# EAGLE board touchpad (EAGLE 9.7.0)
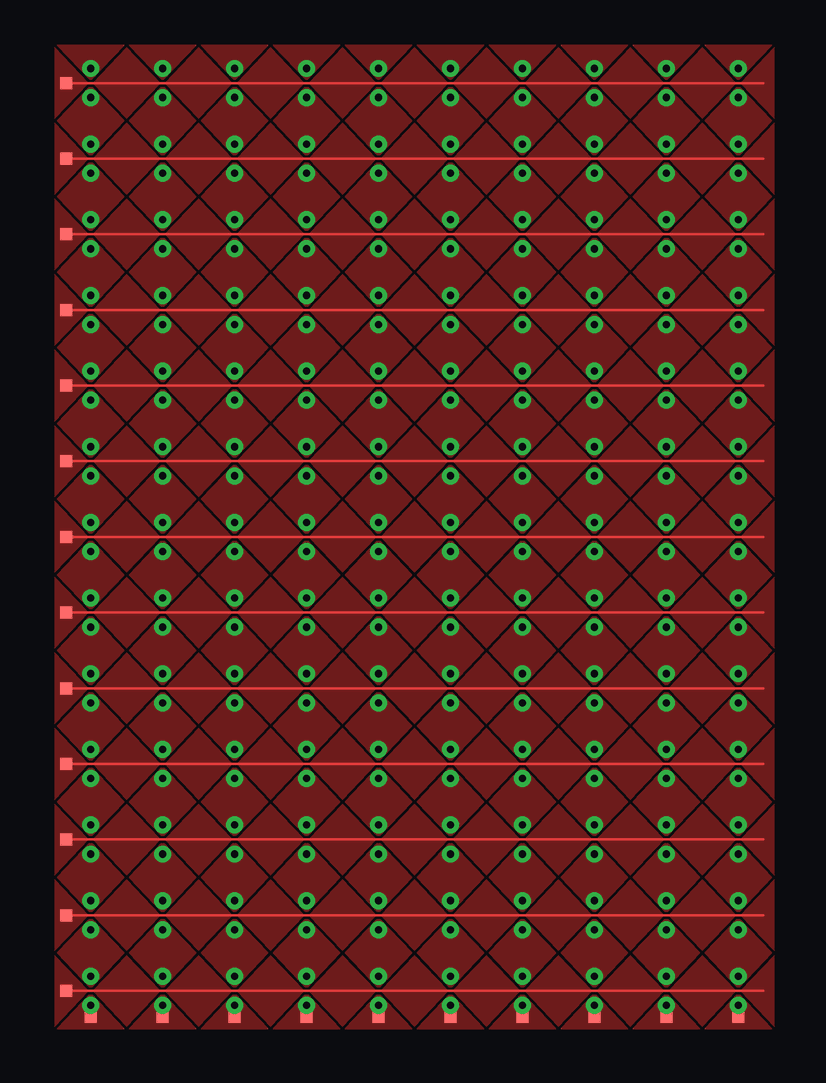
[diagram p0: board, top side]
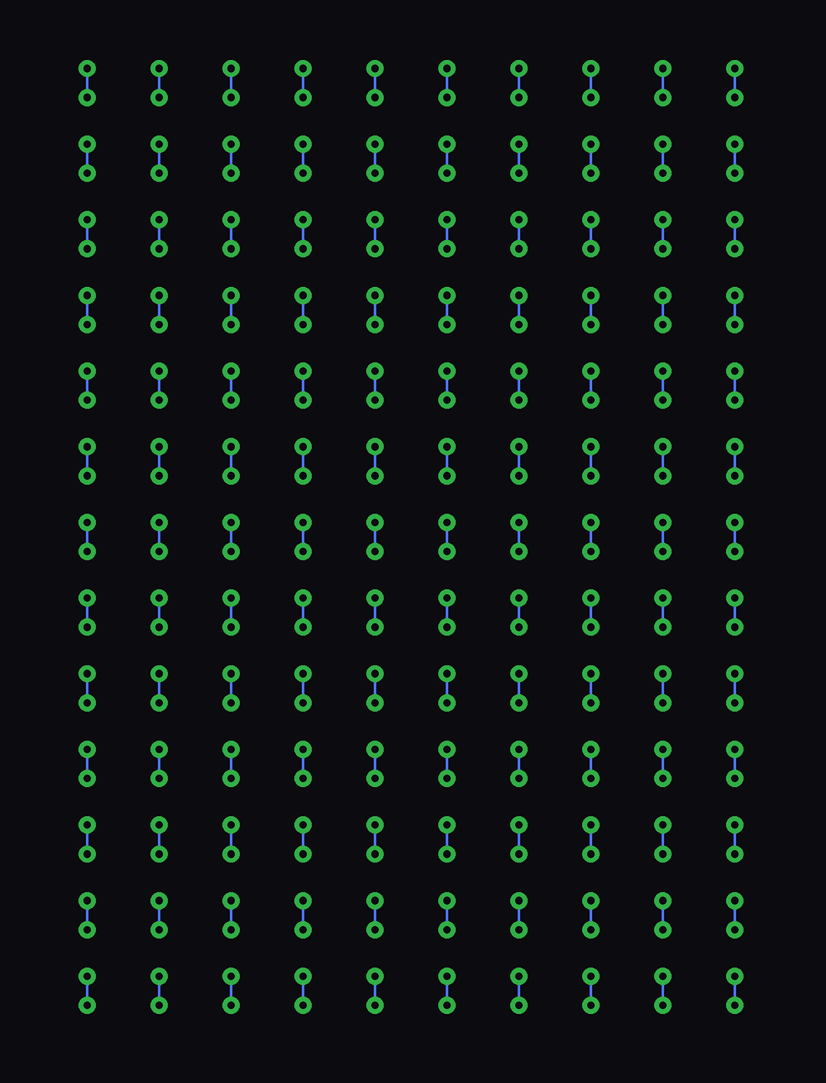
[diagram p1: board, bottom side, seen from below]

No outline drawn. Coordinates in mm, seen from the top.
Copper layers (1*16): Top 0.035mm / dielectric 1.5mm / Bottom 0.035mm
Design rules "JLC-2-Layer.edru": minimum track width 0.1mm, minimum drill 0.35mm, track to track 0.1mm, track to pad 0.1mm, pad to pad 0.1mm, via to via 6mil, smd to smd 0.1mm, copper to edge 0.2mm, drill to drill 6mil, minimum pad ring 10mil, minimum via ring 8mil, stop-mask expansion 4mil, vias tented up to drill 0mil, thermal gap 10mil

## Footprints (pad centres in the part's own frame; a part is rotated, then mirrored left to right if it is on the bottom)
PAD_0_5MM = smd 0.5 x 0.5: P1 0,0

## Placement (x,y rotation side)
COL1  [PAD_0_5MM]  1.5,0.49 0 top
COL2  [PAD_0_5MM]  4.5,0.49 0 top
COL3  [PAD_0_5MM]  7.5,0.49 0 top
COL4  [PAD_0_5MM]  10.5,0.49 0 top
COL5  [PAD_0_5MM]  13.5,0.49 0 top
COL6  [PAD_0_5MM]  16.5,0.49 0 top
COL7  [PAD_0_5MM]  19.5,0.49 0 top
COL8  [PAD_0_5MM]  22.5,0.49 0 top
COL9  [PAD_0_5MM]  25.5,0.49 0 top
COL10  [PAD_0_5MM]  28.5,0.49 0 top
ROW1  [PAD_0_5MM]  0.46,1.58 0 top
ROW2  [PAD_0_5MM]  0.46,4.73 0 top
ROW3  [PAD_0_5MM]  0.46,7.88 0 top
ROW4  [PAD_0_5MM]  0.46,11.04 0 top
ROW5  [PAD_0_5MM]  0.46,14.19 0 top
ROW6  [PAD_0_5MM]  0.46,17.35 0 top
ROW7  [PAD_0_5MM]  0.46,20.5 0 top
ROW8  [PAD_0_5MM]  0.46,23.65 0 top
ROW9  [PAD_0_5MM]  0.46,26.81 0 top
ROW10  [PAD_0_5MM]  0.46,29.96 0 top
ROW11  [PAD_0_5MM]  0.46,33.12 0 top
ROW12  [PAD_0_5MM]  0.46,36.27 0 top
ROW13  [PAD_0_5MM]  0.46,39.42 0 top

## Library data of the parts
COL1-COL10 ROW1-ROW13 = touchpad

## Nets
COL1: COL1.P1
COL2: COL2.P1
COL3: COL3.P1
COL4: COL4.P1
COL5: COL5.P1
COL6: COL6.P1
COL7: COL7.P1
COL8: COL8.P1
COL9: COL9.P1
COL10: COL10.P1
ROW1: ROW1.P1
ROW2: ROW2.P1
ROW3: ROW3.P1
ROW4: ROW4.P1
ROW5: ROW5.P1
ROW6: ROW6.P1
ROW7: ROW7.P1
ROW8: ROW8.P1
ROW9: ROW9.P1
ROW10: ROW10.P1
ROW11: ROW11.P1
ROW12: ROW12.P1
ROW13: ROW13.P1

## Tracks (layer width: path | path; a pad name or v marks a point on that pad's centre or on a via)
COL1  (via drill 0.3 pad 0.4)
  Bottom 0.1: v1.5,0.97 v1.5,2.18 | v1.5,4.12 v1.5,5.34 | v1.5,7.28 v1.5,8.49 | v1.5,10.43 v1.5,11.64 | v1.5,13.59 v1.5,14.8 | v1.5,16.74 v1.5,17.95 | v1.5,19.89 v1.5,21.11 | v1.5,23.05 v1.5,24.26 | v1.5,26.2 v1.5,27.41 | v1.5,29.36 v1.5,30.57 | v1.5,32.51 v1.5,33.72 | v1.5,35.66 v1.5,36.88 | v1.5,38.82 v1.5,40.03
  pour Top (no thermals): 1.5,1.47 0.11,0 2.89,0
  pour Top (no thermals): 1.5,4.62 0.11,3.15 1.5,1.68 2.89,3.15
  pour Top (no thermals): 1.5,7.78 0.11,6.31 1.5,4.84 2.89,6.31
  pour Top (no thermals): 1.5,10.93 0.11,9.46 1.5,7.99 2.89,9.46
  pour Top (no thermals): 1.5,14.09 0.11,12.62 1.5,11.14 2.89,12.62
  pour Top (no thermals): 1.5,17.24 0.11,15.77 1.5,14.3 2.89,15.77
  pour Top (no thermals): 1.5,20.39 0.11,18.92 1.5,17.45 2.89,18.92
  pour Top (no thermals): 1.5,23.55 0.11,22.08 1.5,20.61 2.89,22.08
  pour Top (no thermals): 1.5,26.7 0.11,25.23 1.5,23.76 2.89,25.23
  pour Top (no thermals): 1.5,29.86 0.11,28.38 1.5,26.91 2.89,28.38
  pour Top (no thermals): 1.5,33.01 0.11,31.54 1.5,30.07 2.89,31.54
  pour Top (no thermals): 1.5,36.16 0.11,34.69 1.5,33.22 2.89,34.69
  pour Top (no thermals): 1.5,39.32 0.11,37.85 1.5,36.38 2.89,37.85
  pour Top (no thermals): 2.89,41 0.11,41 1.5,39.53
COL2  (via drill 0.3 pad 0.4)
  Bottom 0.1: v4.5,0.97 v4.5,2.18 | v4.5,4.12 v4.5,5.34 | v4.5,7.28 v4.5,8.49 | v4.5,10.43 v4.5,11.64 | v4.5,13.59 v4.5,14.8 | v4.5,16.74 v4.5,17.95 | v4.5,19.89 v4.5,21.11 | v4.5,23.05 v4.5,24.26 | v4.5,26.2 v4.5,27.41 | v4.5,29.36 v4.5,30.57 | v4.5,32.51 v4.5,33.72 | v4.5,35.66 v4.5,36.88 | v4.5,38.82 v4.5,40.03
  pour Top (no thermals): 4.5,1.47 3.11,0 5.89,0
  pour Top (no thermals): 4.5,4.62 3.11,3.15 4.5,1.68 5.89,3.15
  pour Top (no thermals): 4.5,7.78 3.11,6.31 4.5,4.84 5.89,6.31
  pour Top (no thermals): 4.5,10.93 3.11,9.46 4.5,7.99 5.89,9.46
  pour Top (no thermals): 4.5,14.09 3.11,12.62 4.5,11.14 5.89,12.62
  pour Top (no thermals): 4.5,17.24 3.11,15.77 4.5,14.3 5.89,15.77
  pour Top (no thermals): 4.5,20.39 3.11,18.92 4.5,17.45 5.89,18.92
  pour Top (no thermals): 4.5,23.55 3.11,22.08 4.5,20.61 5.89,22.08
  pour Top (no thermals): 4.5,26.7 3.11,25.23 4.5,23.76 5.89,25.23
  pour Top (no thermals): 4.5,29.86 3.11,28.38 4.5,26.91 5.89,28.38
  pour Top (no thermals): 4.5,33.01 3.11,31.54 4.5,30.07 5.89,31.54
  pour Top (no thermals): 4.5,36.16 3.11,34.69 4.5,33.22 5.89,34.69
  pour Top (no thermals): 4.5,39.32 3.11,37.85 4.5,36.38 5.89,37.85
  pour Top (no thermals): 5.89,41 3.11,41 4.5,39.53
COL3  (via drill 0.3 pad 0.4)
  Bottom 0.1: v7.5,0.97 v7.5,2.18 | v7.5,4.12 v7.5,5.34 | v7.5,7.28 v7.5,8.49 | v7.5,10.43 v7.5,11.64 | v7.5,13.59 v7.5,14.8 | v7.5,16.74 v7.5,17.95 | v7.5,19.89 v7.5,21.11 | v7.5,23.05 v7.5,24.26 | v7.5,26.2 v7.5,27.41 | v7.5,29.36 v7.5,30.57 | v7.5,32.51 v7.5,33.72 | v7.5,35.66 v7.5,36.88 | v7.5,38.82 v7.5,40.03
  pour Top (no thermals): 7.5,1.47 6.11,0 8.89,0
  pour Top (no thermals): 7.5,4.62 6.11,3.15 7.5,1.68 8.89,3.15
  pour Top (no thermals): 7.5,7.78 6.11,6.31 7.5,4.84 8.89,6.31
  pour Top (no thermals): 7.5,10.93 6.11,9.46 7.5,7.99 8.89,9.46
  pour Top (no thermals): 7.5,14.09 6.11,12.62 7.5,11.14 8.89,12.62
  pour Top (no thermals): 7.5,17.24 6.11,15.77 7.5,14.3 8.89,15.77
  pour Top (no thermals): 7.5,20.39 6.11,18.92 7.5,17.45 8.89,18.92
  pour Top (no thermals): 7.5,23.55 6.11,22.08 7.5,20.61 8.89,22.08
  pour Top (no thermals): 7.5,26.7 6.11,25.23 7.5,23.76 8.89,25.23
  pour Top (no thermals): 7.5,29.86 6.11,28.38 7.5,26.91 8.89,28.38
  pour Top (no thermals): 7.5,33.01 6.11,31.54 7.5,30.07 8.89,31.54
  pour Top (no thermals): 7.5,36.16 6.11,34.69 7.5,33.22 8.89,34.69
  pour Top (no thermals): 7.5,39.32 6.11,37.85 7.5,36.38 8.89,37.85
  pour Top (no thermals): 8.89,41 6.11,41 7.5,39.53
COL4  (via drill 0.3 pad 0.4)
  Bottom 0.1: v10.5,0.97 v10.5,2.18 | v10.5,4.12 v10.5,5.34 | v10.5,7.28 v10.5,8.49 | v10.5,10.43 v10.5,11.64 | v10.5,13.59 v10.5,14.8 | v10.5,16.74 v10.5,17.95 | v10.5,19.89 v10.5,21.11 | v10.5,23.05 v10.5,24.26 | v10.5,26.2 v10.5,27.41 | v10.5,29.36 v10.5,30.57 | v10.5,32.51 v10.5,33.72 | v10.5,35.66 v10.5,36.88 | v10.5,38.82 v10.5,40.03
  pour Top (no thermals): 10.5,1.47 9.11,0 11.89,0
  pour Top (no thermals): 10.5,4.62 9.11,3.15 10.5,1.68 11.89,3.15
  pour Top (no thermals): 10.5,7.78 9.11,6.31 10.5,4.84 11.89,6.31
  pour Top (no thermals): 10.5,10.93 9.11,9.46 10.5,7.99 11.89,9.46
  pour Top (no thermals): 10.5,14.09 9.11,12.62 10.5,11.14 11.89,12.62
  pour Top (no thermals): 10.5,17.24 9.11,15.77 10.5,14.3 11.89,15.77
  pour Top (no thermals): 10.5,20.39 9.11,18.92 10.5,17.45 11.89,18.92
  pour Top (no thermals): 10.5,23.55 9.11,22.08 10.5,20.61 11.89,22.08
  pour Top (no thermals): 10.5,26.7 9.11,25.23 10.5,23.76 11.89,25.23
  pour Top (no thermals): 10.5,29.86 9.11,28.38 10.5,26.91 11.89,28.38
  pour Top (no thermals): 10.5,33.01 9.11,31.54 10.5,30.07 11.89,31.54
  pour Top (no thermals): 10.5,36.16 9.11,34.69 10.5,33.22 11.89,34.69
  pour Top (no thermals): 10.5,39.32 9.11,37.85 10.5,36.38 11.89,37.85
  pour Top (no thermals): 11.89,41 9.11,41 10.5,39.53
COL5  (via drill 0.3 pad 0.4)
  Bottom 0.1: v13.5,0.97 v13.5,2.18 | v13.5,4.12 v13.5,5.34 | v13.5,7.28 v13.5,8.49 | v13.5,10.43 v13.5,11.64 | v13.5,13.59 v13.5,14.8 | v13.5,16.74 v13.5,17.95 | v13.5,19.89 v13.5,21.11 | v13.5,23.05 v13.5,24.26 | v13.5,26.2 v13.5,27.41 | v13.5,29.36 v13.5,30.57 | v13.5,32.51 v13.5,33.72 | v13.5,35.66 v13.5,36.88 | v13.5,38.82 v13.5,40.03
  pour Top (no thermals): 13.5,1.47 12.11,0 14.89,0
  pour Top (no thermals): 13.5,4.62 12.11,3.15 13.5,1.68 14.89,3.15
  pour Top (no thermals): 13.5,7.78 12.11,6.31 13.5,4.84 14.89,6.31
  pour Top (no thermals): 13.5,10.93 12.11,9.46 13.5,7.99 14.89,9.46
  pour Top (no thermals): 13.5,14.09 12.11,12.62 13.5,11.14 14.89,12.62
  pour Top (no thermals): 13.5,17.24 12.11,15.77 13.5,14.3 14.89,15.77
  pour Top (no thermals): 13.5,20.39 12.11,18.92 13.5,17.45 14.89,18.92
  pour Top (no thermals): 13.5,23.55 12.11,22.08 13.5,20.61 14.89,22.08
  pour Top (no thermals): 13.5,26.7 12.11,25.23 13.5,23.76 14.89,25.23
  pour Top (no thermals): 13.5,29.86 12.11,28.38 13.5,26.91 14.89,28.38
  pour Top (no thermals): 13.5,33.01 12.11,31.54 13.5,30.07 14.89,31.54
  pour Top (no thermals): 13.5,36.16 12.11,34.69 13.5,33.22 14.89,34.69
  pour Top (no thermals): 13.5,39.32 12.11,37.85 13.5,36.38 14.89,37.85
  pour Top (no thermals): 14.89,41 12.11,41 13.5,39.53
COL6  (via drill 0.3 pad 0.4)
  Bottom 0.1: v16.5,0.97 v16.5,2.18 | v16.5,4.12 v16.5,5.34 | v16.5,7.28 v16.5,8.49 | v16.5,10.43 v16.5,11.64 | v16.5,13.59 v16.5,14.8 | v16.5,16.74 v16.5,17.95 | v16.5,19.89 v16.5,21.11 | v16.5,23.05 v16.5,24.26 | v16.5,26.2 v16.5,27.41 | v16.5,29.36 v16.5,30.57 | v16.5,32.51 v16.5,33.72 | v16.5,35.66 v16.5,36.88 | v16.5,38.82 v16.5,40.03
  pour Top (no thermals): 16.5,1.47 15.11,0 17.89,0
  pour Top (no thermals): 16.5,4.62 15.11,3.15 16.5,1.68 17.89,3.15
  pour Top (no thermals): 16.5,7.78 15.11,6.31 16.5,4.84 17.89,6.31
  pour Top (no thermals): 16.5,10.93 15.11,9.46 16.5,7.99 17.89,9.46
  pour Top (no thermals): 16.5,14.09 15.11,12.62 16.5,11.14 17.89,12.62
  pour Top (no thermals): 16.5,17.24 15.11,15.77 16.5,14.3 17.89,15.77
  pour Top (no thermals): 16.5,20.39 15.11,18.92 16.5,17.45 17.89,18.92
  pour Top (no thermals): 16.5,23.55 15.11,22.08 16.5,20.61 17.89,22.08
  pour Top (no thermals): 16.5,26.7 15.11,25.23 16.5,23.76 17.89,25.23
  pour Top (no thermals): 16.5,29.86 15.11,28.38 16.5,26.91 17.89,28.38
  pour Top (no thermals): 16.5,33.01 15.11,31.54 16.5,30.07 17.89,31.54
  pour Top (no thermals): 16.5,36.16 15.11,34.69 16.5,33.22 17.89,34.69
  pour Top (no thermals): 16.5,39.32 15.11,37.85 16.5,36.38 17.89,37.85
  pour Top (no thermals): 17.89,41 15.11,41 16.5,39.53
COL7  (via drill 0.3 pad 0.4)
  Bottom 0.1: v19.5,0.97 v19.5,2.18 | v19.5,4.12 v19.5,5.34 | v19.5,7.28 v19.5,8.49 | v19.5,10.43 v19.5,11.64 | v19.5,13.59 v19.5,14.8 | v19.5,16.74 v19.5,17.95 | v19.5,19.89 v19.5,21.11 | v19.5,23.05 v19.5,24.26 | v19.5,26.2 v19.5,27.41 | v19.5,29.36 v19.5,30.57 | v19.5,32.51 v19.5,33.72 | v19.5,35.66 v19.5,36.88 | v19.5,38.82 v19.5,40.03
  pour Top (no thermals): 19.5,1.47 18.11,0 20.89,0
  pour Top (no thermals): 19.5,4.62 18.11,3.15 19.5,1.68 20.89,3.15
  pour Top (no thermals): 19.5,7.78 18.11,6.31 19.5,4.84 20.89,6.31
  pour Top (no thermals): 19.5,10.93 18.11,9.46 19.5,7.99 20.89,9.46
  pour Top (no thermals): 19.5,14.09 18.11,12.62 19.5,11.14 20.89,12.62
  pour Top (no thermals): 19.5,17.24 18.11,15.77 19.5,14.3 20.89,15.77
  pour Top (no thermals): 19.5,20.39 18.11,18.92 19.5,17.45 20.89,18.92
  pour Top (no thermals): 19.5,23.55 18.11,22.08 19.5,20.61 20.89,22.08
  pour Top (no thermals): 19.5,26.7 18.11,25.23 19.5,23.76 20.89,25.23
  pour Top (no thermals): 19.5,29.86 18.11,28.38 19.5,26.91 20.89,28.38
  pour Top (no thermals): 19.5,33.01 18.11,31.54 19.5,30.07 20.89,31.54
  pour Top (no thermals): 19.5,36.16 18.11,34.69 19.5,33.22 20.89,34.69
  pour Top (no thermals): 19.5,39.32 18.11,37.85 19.5,36.38 20.89,37.85
  pour Top (no thermals): 20.89,41 18.11,41 19.5,39.53
COL8  (via drill 0.3 pad 0.4)
  Bottom 0.1: v22.5,0.97 v22.5,2.18 | v22.5,4.12 v22.5,5.34 | v22.5,7.28 v22.5,8.49 | v22.5,10.43 v22.5,11.64 | v22.5,13.59 v22.5,14.8 | v22.5,16.74 v22.5,17.95 | v22.5,19.89 v22.5,21.11 | v22.5,23.05 v22.5,24.26 | v22.5,26.2 v22.5,27.41 | v22.5,29.36 v22.5,30.57 | v22.5,32.51 v22.5,33.72 | v22.5,35.66 v22.5,36.88 | v22.5,38.82 v22.5,40.03
  pour Top (no thermals): 22.5,1.47 21.11,0 23.89,0
  pour Top (no thermals): 22.5,4.62 21.11,3.15 22.5,1.68 23.89,3.15
  pour Top (no thermals): 22.5,7.78 21.11,6.31 22.5,4.84 23.89,6.31
  pour Top (no thermals): 22.5,10.93 21.11,9.46 22.5,7.99 23.89,9.46
  pour Top (no thermals): 22.5,14.09 21.11,12.62 22.5,11.14 23.89,12.62
  pour Top (no thermals): 22.5,17.24 21.11,15.77 22.5,14.3 23.89,15.77
  pour Top (no thermals): 22.5,20.39 21.11,18.92 22.5,17.45 23.89,18.92
  pour Top (no thermals): 22.5,23.55 21.11,22.08 22.5,20.61 23.89,22.08
  pour Top (no thermals): 22.5,26.7 21.11,25.23 22.5,23.76 23.89,25.23
  pour Top (no thermals): 22.5,29.86 21.11,28.38 22.5,26.91 23.89,28.38
  pour Top (no thermals): 22.5,33.01 21.11,31.54 22.5,30.07 23.89,31.54
  pour Top (no thermals): 22.5,36.16 21.11,34.69 22.5,33.22 23.89,34.69
  pour Top (no thermals): 22.5,39.32 21.11,37.85 22.5,36.38 23.89,37.85
  pour Top (no thermals): 23.89,41 21.11,41 22.5,39.53
COL9  (via drill 0.3 pad 0.4)
  Bottom 0.1: v25.5,0.97 v25.5,2.18 | v25.5,4.12 v25.5,5.34 | v25.5,7.28 v25.5,8.49 | v25.5,10.43 v25.5,11.64 | v25.5,13.59 v25.5,14.8 | v25.5,16.74 v25.5,17.95 | v25.5,19.89 v25.5,21.11 | v25.5,23.05 v25.5,24.26 | v25.5,26.2 v25.5,27.41 | v25.5,29.36 v25.5,30.57 | v25.5,32.51 v25.5,33.72 | v25.5,35.66 v25.5,36.88 | v25.5,38.82 v25.5,40.03
  pour Top (no thermals): 25.5,1.47 24.11,0 26.89,0
  pour Top (no thermals): 25.5,4.62 24.11,3.15 25.5,1.68 26.89,3.15
  pour Top (no thermals): 25.5,7.78 24.11,6.31 25.5,4.84 26.89,6.31
  pour Top (no thermals): 25.5,10.93 24.11,9.46 25.5,7.99 26.89,9.46
  pour Top (no thermals): 25.5,14.09 24.11,12.62 25.5,11.14 26.89,12.62
  pour Top (no thermals): 25.5,17.24 24.11,15.77 25.5,14.3 26.89,15.77
  pour Top (no thermals): 25.5,20.39 24.11,18.92 25.5,17.45 26.89,18.92
  pour Top (no thermals): 25.5,23.55 24.11,22.08 25.5,20.61 26.89,22.08
  pour Top (no thermals): 25.5,26.7 24.11,25.23 25.5,23.76 26.89,25.23
  pour Top (no thermals): 25.5,29.86 24.11,28.38 25.5,26.91 26.89,28.38
  pour Top (no thermals): 25.5,33.01 24.11,31.54 25.5,30.07 26.89,31.54
  pour Top (no thermals): 25.5,36.16 24.11,34.69 25.5,33.22 26.89,34.69
  pour Top (no thermals): 25.5,39.32 24.11,37.85 25.5,36.38 26.89,37.85
  pour Top (no thermals): 26.89,41 24.11,41 25.5,39.53
COL10  (via drill 0.3 pad 0.4)
  Bottom 0.1: v28.5,0.97 v28.5,2.18 | v28.5,4.12 v28.5,5.34 | v28.5,7.28 v28.5,8.49 | v28.5,10.43 v28.5,11.64 | v28.5,13.59 v28.5,14.8 | v28.5,16.74 v28.5,17.95 | v28.5,19.89 v28.5,21.11 | v28.5,23.05 v28.5,24.26 | v28.5,26.2 v28.5,27.41 | v28.5,29.36 v28.5,30.57 | v28.5,32.51 v28.5,33.72 | v28.5,35.66 v28.5,36.88 | v28.5,38.82 v28.5,40.03
  pour Top (no thermals): 28.5,1.47 27.11,0 29.89,0
  pour Top (no thermals): 28.5,4.62 27.11,3.15 28.5,1.68 29.89,3.15
  pour Top (no thermals): 28.5,7.78 27.11,6.31 28.5,4.84 29.89,6.31
  pour Top (no thermals): 28.5,10.93 27.11,9.46 28.5,7.99 29.89,9.46
  pour Top (no thermals): 28.5,14.09 27.11,12.62 28.5,11.14 29.89,12.62
  pour Top (no thermals): 28.5,17.24 27.11,15.77 28.5,14.3 29.89,15.77
  pour Top (no thermals): 28.5,20.39 27.11,18.92 28.5,17.45 29.89,18.92
  pour Top (no thermals): 28.5,23.55 27.11,22.08 28.5,20.61 29.89,22.08
  pour Top (no thermals): 28.5,26.7 27.11,25.23 28.5,23.76 29.89,25.23
  pour Top (no thermals): 28.5,29.86 27.11,28.38 28.5,26.91 29.89,28.38
  pour Top (no thermals): 28.5,33.01 27.11,31.54 28.5,30.07 29.89,31.54
  pour Top (no thermals): 28.5,36.16 27.11,34.69 28.5,33.22 29.89,34.69
  pour Top (no thermals): 28.5,39.32 27.11,37.85 28.5,36.38 29.89,37.85
  pour Top (no thermals): 29.89,41 27.11,41 28.5,39.53
ROW1
  Top 0.1: ROW1.P1 3,1.58 6,1.58 9,1.58 12,1.58 15,1.58 18,1.58 21,1.58 24,1.58 27,1.58 29.54,1.58
  pour Top (no thermals): 1.39,1.58 0,3.05 0,0.11
  pour Top (no thermals): 3,3.05 1.61,1.58 3,0.11 4.39,1.58
  pour Top (no thermals): 6,3.05 4.61,1.58 6,0.11 7.39,1.58
  pour Top (no thermals): 9,3.05 7.61,1.58 9,0.11 10.39,1.58
  pour Top (no thermals): 12,3.05 10.61,1.58 12,0.11 13.39,1.58
  pour Top (no thermals): 15,3.05 13.61,1.58 15,0.11 16.39,1.58
  pour Top (no thermals): 18,3.05 16.61,1.58 18,0.11 19.39,1.58
  pour Top (no thermals): 21,3.05 19.61,1.58 21,0.11 22.39,1.58
  pour Top (no thermals): 24,3.05 22.61,1.58 24,0.11 25.39,1.58
  pour Top (no thermals): 27,3.05 25.61,1.58 27,0.11 28.39,1.58
  pour Top (no thermals): 28.61,1.58 30,0.11 30,3.05
ROW2
  Top 0.1: ROW2.P1 3,4.73 6,4.73 9,4.73 12,4.73 15,4.73 18,4.73 21,4.73 24,4.73 27,4.73 29.54,4.73
  pour Top (no thermals): 1.39,4.73 0,6.2 0,3.26
  pour Top (no thermals): 3,6.2 1.61,4.73 3,3.26 4.39,4.73
  pour Top (no thermals): 6,6.2 4.61,4.73 6,3.26 7.39,4.73
  pour Top (no thermals): 9,6.2 7.61,4.73 9,3.26 10.39,4.73
  pour Top (no thermals): 12,6.2 10.61,4.73 12,3.26 13.39,4.73
  pour Top (no thermals): 15,6.2 13.61,4.73 15,3.26 16.39,4.73
  pour Top (no thermals): 18,6.2 16.61,4.73 18,3.26 19.39,4.73
  pour Top (no thermals): 21,6.2 19.61,4.73 21,3.26 22.39,4.73
  pour Top (no thermals): 24,6.2 22.61,4.73 24,3.26 25.39,4.73
  pour Top (no thermals): 27,6.2 25.61,4.73 27,3.26 28.39,4.73
  pour Top (no thermals): 28.61,4.73 30,3.26 30,6.2
ROW3
  Top 0.1: ROW3.P1 3,7.88 6,7.88 9,7.88 12,7.88 15,7.88 18,7.88 21,7.88 24,7.88 27,7.88 29.54,7.88
  pour Top (no thermals): 1.39,7.88 0,9.36 0,6.41
  pour Top (no thermals): 3,9.36 1.61,7.88 3,6.41 4.39,7.88
  pour Top (no thermals): 6,9.36 4.61,7.88 6,6.41 7.39,7.88
  pour Top (no thermals): 9,9.36 7.61,7.88 9,6.41 10.39,7.88
  pour Top (no thermals): 12,9.36 10.61,7.88 12,6.41 13.39,7.88
  pour Top (no thermals): 15,9.36 13.61,7.88 15,6.41 16.39,7.88
  pour Top (no thermals): 18,9.36 16.61,7.88 18,6.41 19.39,7.88
  pour Top (no thermals): 21,9.36 19.61,7.88 21,6.41 22.39,7.88
  pour Top (no thermals): 24,9.36 22.61,7.88 24,6.41 25.39,7.88
  pour Top (no thermals): 27,9.36 25.61,7.88 27,6.41 28.39,7.88
  pour Top (no thermals): 28.61,7.88 30,6.41 30,9.36
ROW4
  Top 0.1: ROW4.P1 3,11.04 6,11.04 9,11.04 12,11.04 15,11.04 18,11.04 21,11.04 24,11.04 27,11.04 29.54,11.04
  pour Top (no thermals): 1.39,11.04 0,12.51 0,9.57
  pour Top (no thermals): 3,12.51 1.61,11.04 3,9.57 4.39,11.04
  pour Top (no thermals): 6,12.51 4.61,11.04 6,9.57 7.39,11.04
  pour Top (no thermals): 9,12.51 7.61,11.04 9,9.57 10.39,11.04
  pour Top (no thermals): 12,12.51 10.61,11.04 12,9.57 13.39,11.04
  pour Top (no thermals): 15,12.51 13.61,11.04 15,9.57 16.39,11.04
  pour Top (no thermals): 18,12.51 16.61,11.04 18,9.57 19.39,11.04
  pour Top (no thermals): 21,12.51 19.61,11.04 21,9.57 22.39,11.04
  pour Top (no thermals): 24,12.51 22.61,11.04 24,9.57 25.39,11.04
  pour Top (no thermals): 27,12.51 25.61,11.04 27,9.57 28.39,11.04
  pour Top (no thermals): 28.61,11.04 30,9.57 30,12.51
ROW5
  Top 0.1: ROW5.P1 3,14.19 6,14.19 9,14.19 12,14.19 15,14.19 18,14.19 21,14.19 24,14.19 27,14.19 29.54,14.19
  pour Top (no thermals): 1.39,14.19 0,15.66 0,12.72
  pour Top (no thermals): 3,15.66 1.61,14.19 3,12.72 4.39,14.19
  pour Top (no thermals): 6,15.66 4.61,14.19 6,12.72 7.39,14.19
  pour Top (no thermals): 9,15.66 7.61,14.19 9,12.72 10.39,14.19
  pour Top (no thermals): 12,15.66 10.61,14.19 12,12.72 13.39,14.19
  pour Top (no thermals): 15,15.66 13.61,14.19 15,12.72 16.39,14.19
  pour Top (no thermals): 18,15.66 16.61,14.19 18,12.72 19.39,14.19
  pour Top (no thermals): 21,15.66 19.61,14.19 21,12.72 22.39,14.19
  pour Top (no thermals): 24,15.66 22.61,14.19 24,12.72 25.39,14.19
  pour Top (no thermals): 27,15.66 25.61,14.19 27,12.72 28.39,14.19
  pour Top (no thermals): 28.61,14.19 30,12.72 30,15.66
ROW6
  Top 0.1: ROW6.P1 3,17.35 6,17.35 9,17.35 12,17.35 15,17.35 18,17.35 21,17.35 24,17.35 27,17.35 29.54,17.35
  pour Top (no thermals): 1.39,17.35 0,18.82 0,15.88
  pour Top (no thermals): 3,18.82 1.61,17.35 3,15.88 4.39,17.35
  pour Top (no thermals): 6,18.82 4.61,17.35 6,15.88 7.39,17.35
  pour Top (no thermals): 9,18.82 7.61,17.35 9,15.88 10.39,17.35
  pour Top (no thermals): 12,18.82 10.61,17.35 12,15.88 13.39,17.35
  pour Top (no thermals): 15,18.82 13.61,17.35 15,15.88 16.39,17.35
  pour Top (no thermals): 18,18.82 16.61,17.35 18,15.88 19.39,17.35
  pour Top (no thermals): 21,18.82 19.61,17.35 21,15.88 22.39,17.35
  pour Top (no thermals): 24,18.82 22.61,17.35 24,15.88 25.39,17.35
  pour Top (no thermals): 27,18.82 25.61,17.35 27,15.88 28.39,17.35
  pour Top (no thermals): 28.61,17.35 30,15.88 30,18.82
ROW7
  Top 0.1: ROW7.P1 3,20.5 6,20.5 9,20.5 12,20.5 15,20.5 18,20.5 21,20.5 24,20.5 27,20.5 29.54,20.5
  pour Top (no thermals): 1.39,20.5 0,21.97 0,19.03
  pour Top (no thermals): 3,21.97 1.61,20.5 3,19.03 4.39,20.5
  pour Top (no thermals): 6,21.97 4.61,20.5 6,19.03 7.39,20.5
  pour Top (no thermals): 9,21.97 7.61,20.5 9,19.03 10.39,20.5
  pour Top (no thermals): 12,21.97 10.61,20.5 12,19.03 13.39,20.5
  pour Top (no thermals): 15,21.97 13.61,20.5 15,19.03 16.39,20.5
  pour Top (no thermals): 18,21.97 16.61,20.5 18,19.03 19.39,20.5
  pour Top (no thermals): 21,21.97 19.61,20.5 21,19.03 22.39,20.5
  pour Top (no thermals): 24,21.97 22.61,20.5 24,19.03 25.39,20.5
  pour Top (no thermals): 27,21.97 25.61,20.5 27,19.03 28.39,20.5
  pour Top (no thermals): 28.61,20.5 30,19.03 30,21.97
ROW8
  Top 0.1: ROW8.P1 3,23.65 6,23.65 9,23.65 12,23.65 15,23.65 18,23.65 21,23.65 24,23.65 27,23.65 29.54,23.65
  pour Top (no thermals): 1.39,23.65 0,25.12 0,22.18
  pour Top (no thermals): 3,25.12 1.61,23.65 3,22.18 4.39,23.65
  pour Top (no thermals): 6,25.12 4.61,23.65 6,22.18 7.39,23.65
  pour Top (no thermals): 9,25.12 7.61,23.65 9,22.18 10.39,23.65
  pour Top (no thermals): 12,25.12 10.61,23.65 12,22.18 13.39,23.65
  pour Top (no thermals): 15,25.12 13.61,23.65 15,22.18 16.39,23.65
  pour Top (no thermals): 18,25.12 16.61,23.65 18,22.18 19.39,23.65
  pour Top (no thermals): 21,25.12 19.61,23.65 21,22.18 22.39,23.65
  pour Top (no thermals): 24,25.12 22.61,23.65 24,22.18 25.39,23.65
  pour Top (no thermals): 27,25.12 25.61,23.65 27,22.18 28.39,23.65
  pour Top (no thermals): 28.61,23.65 30,22.18 30,25.12
ROW9
  Top 0.1: ROW9.P1 3,26.81 6,26.81 9,26.81 12,26.81 15,26.81 18,26.81 21,26.81 24,26.81 27,26.81 29.54,26.81
  pour Top (no thermals): 1.39,26.81 0,28.28 0,25.34
  pour Top (no thermals): 3,28.28 1.61,26.81 3,25.34 4.39,26.81
  pour Top (no thermals): 6,28.28 4.61,26.81 6,25.34 7.39,26.81
  pour Top (no thermals): 9,28.28 7.61,26.81 9,25.34 10.39,26.81
  pour Top (no thermals): 12,28.28 10.61,26.81 12,25.34 13.39,26.81
  pour Top (no thermals): 15,28.28 13.61,26.81 15,25.34 16.39,26.81
  pour Top (no thermals): 18,28.28 16.61,26.81 18,25.34 19.39,26.81
  pour Top (no thermals): 21,28.28 19.61,26.81 21,25.34 22.39,26.81
  pour Top (no thermals): 24,28.28 22.61,26.81 24,25.34 25.39,26.81
  pour Top (no thermals): 27,28.28 25.61,26.81 27,25.34 28.39,26.81
  pour Top (no thermals): 28.61,26.81 30,25.34 30,28.28
ROW10
  Top 0.1: ROW10.P1 3,29.96 6,29.96 9,29.96 12,29.96 15,29.96 18,29.96 21,29.96 24,29.96 27,29.96 29.54,29.96
  pour Top (no thermals): 1.39,29.96 0,31.43 0,28.49
  pour Top (no thermals): 3,31.43 1.61,29.96 3,28.49 4.39,29.96
  pour Top (no thermals): 6,31.43 4.61,29.96 6,28.49 7.39,29.96
  pour Top (no thermals): 9,31.43 7.61,29.96 9,28.49 10.39,29.96
  pour Top (no thermals): 12,31.43 10.61,29.96 12,28.49 13.39,29.96
  pour Top (no thermals): 15,31.43 13.61,29.96 15,28.49 16.39,29.96
  pour Top (no thermals): 18,31.43 16.61,29.96 18,28.49 19.39,29.96
  pour Top (no thermals): 21,31.43 19.61,29.96 21,28.49 22.39,29.96
  pour Top (no thermals): 24,31.43 22.61,29.96 24,28.49 25.39,29.96
  pour Top (no thermals): 27,31.43 25.61,29.96 27,28.49 28.39,29.96
  pour Top (no thermals): 28.61,29.96 30,28.49 30,31.43
ROW11
  Top 0.1: ROW11.P1 3,33.12 6,33.12 9,33.12 12,33.12 15,33.12 18,33.12 21,33.12 24,33.12 27,33.12 29.54,33.12
  pour Top (no thermals): 1.39,33.12 0,34.59 0,31.64
  pour Top (no thermals): 3,34.59 1.61,33.12 3,31.64 4.39,33.12
  pour Top (no thermals): 6,34.59 4.61,33.12 6,31.64 7.39,33.12
  pour Top (no thermals): 9,34.59 7.61,33.12 9,31.64 10.39,33.12
  pour Top (no thermals): 12,34.59 10.61,33.12 12,31.64 13.39,33.12
  pour Top (no thermals): 15,34.59 13.61,33.12 15,31.64 16.39,33.12
  pour Top (no thermals): 18,34.59 16.61,33.12 18,31.64 19.39,33.12
  pour Top (no thermals): 21,34.59 19.61,33.12 21,31.64 22.39,33.12
  pour Top (no thermals): 24,34.59 22.61,33.12 24,31.64 25.39,33.12
  pour Top (no thermals): 27,34.59 25.61,33.12 27,31.64 28.39,33.12
  pour Top (no thermals): 28.61,33.12 30,31.64 30,34.59
ROW12
  Top 0.1: ROW12.P1 3,36.27 6,36.27 9,36.27 12,36.27 15,36.27 18,36.27 21,36.27 24,36.27 27,36.27 29.54,36.27
  pour Top (no thermals): 1.39,36.27 0,37.74 0,34.8
  pour Top (no thermals): 3,37.74 1.61,36.27 3,34.8 4.39,36.27
  pour Top (no thermals): 6,37.74 4.61,36.27 6,34.8 7.39,36.27
  pour Top (no thermals): 9,37.74 7.61,36.27 9,34.8 10.39,36.27
  pour Top (no thermals): 12,37.74 10.61,36.27 12,34.8 13.39,36.27
  pour Top (no thermals): 15,37.74 13.61,36.27 15,34.8 16.39,36.27
  pour Top (no thermals): 18,37.74 16.61,36.27 18,34.8 19.39,36.27
  pour Top (no thermals): 21,37.74 19.61,36.27 21,34.8 22.39,36.27
  pour Top (no thermals): 24,37.74 22.61,36.27 24,34.8 25.39,36.27
  pour Top (no thermals): 27,37.74 25.61,36.27 27,34.8 28.39,36.27
  pour Top (no thermals): 28.61,36.27 30,34.8 30,37.74
ROW13
  Top 0.1: ROW13.P1 3,39.42 6,39.42 9,39.42 12,39.42 15,39.42 18,39.42 21,39.42 24,39.42 27,39.42 29.54,39.42
  pour Top (no thermals): 1.39,39.42 0,40.89 0,37.95
  pour Top (no thermals): 3,40.89 1.61,39.42 3,37.95 4.39,39.42
  pour Top (no thermals): 6,40.89 4.61,39.42 6,37.95 7.39,39.42
  pour Top (no thermals): 9,40.89 7.61,39.42 9,37.95 10.39,39.42
  pour Top (no thermals): 12,40.89 10.61,39.42 12,37.95 13.39,39.42
  pour Top (no thermals): 15,40.89 13.61,39.42 15,37.95 16.39,39.42
  pour Top (no thermals): 18,40.89 16.61,39.42 18,37.95 19.39,39.42
  pour Top (no thermals): 21,40.89 19.61,39.42 21,37.95 22.39,39.42
  pour Top (no thermals): 24,40.89 22.61,39.42 24,37.95 25.39,39.42
  pour Top (no thermals): 27,40.89 25.61,39.42 27,37.95 28.39,39.42
  pour Top (no thermals): 28.61,39.42 30,37.95 30,40.89